# Altium PCB Radio.PcbDoc
Units mil, origin at the board's own origin, x right, y up, seen from the top; angles counter-clockwise.
Board outline 1170 x 1315 mil, 2 copper layers (Top Layer, Bottom Layer), stack 60.4 mil thick; 18 components, 17 nets, 106 pads, 43 vias.
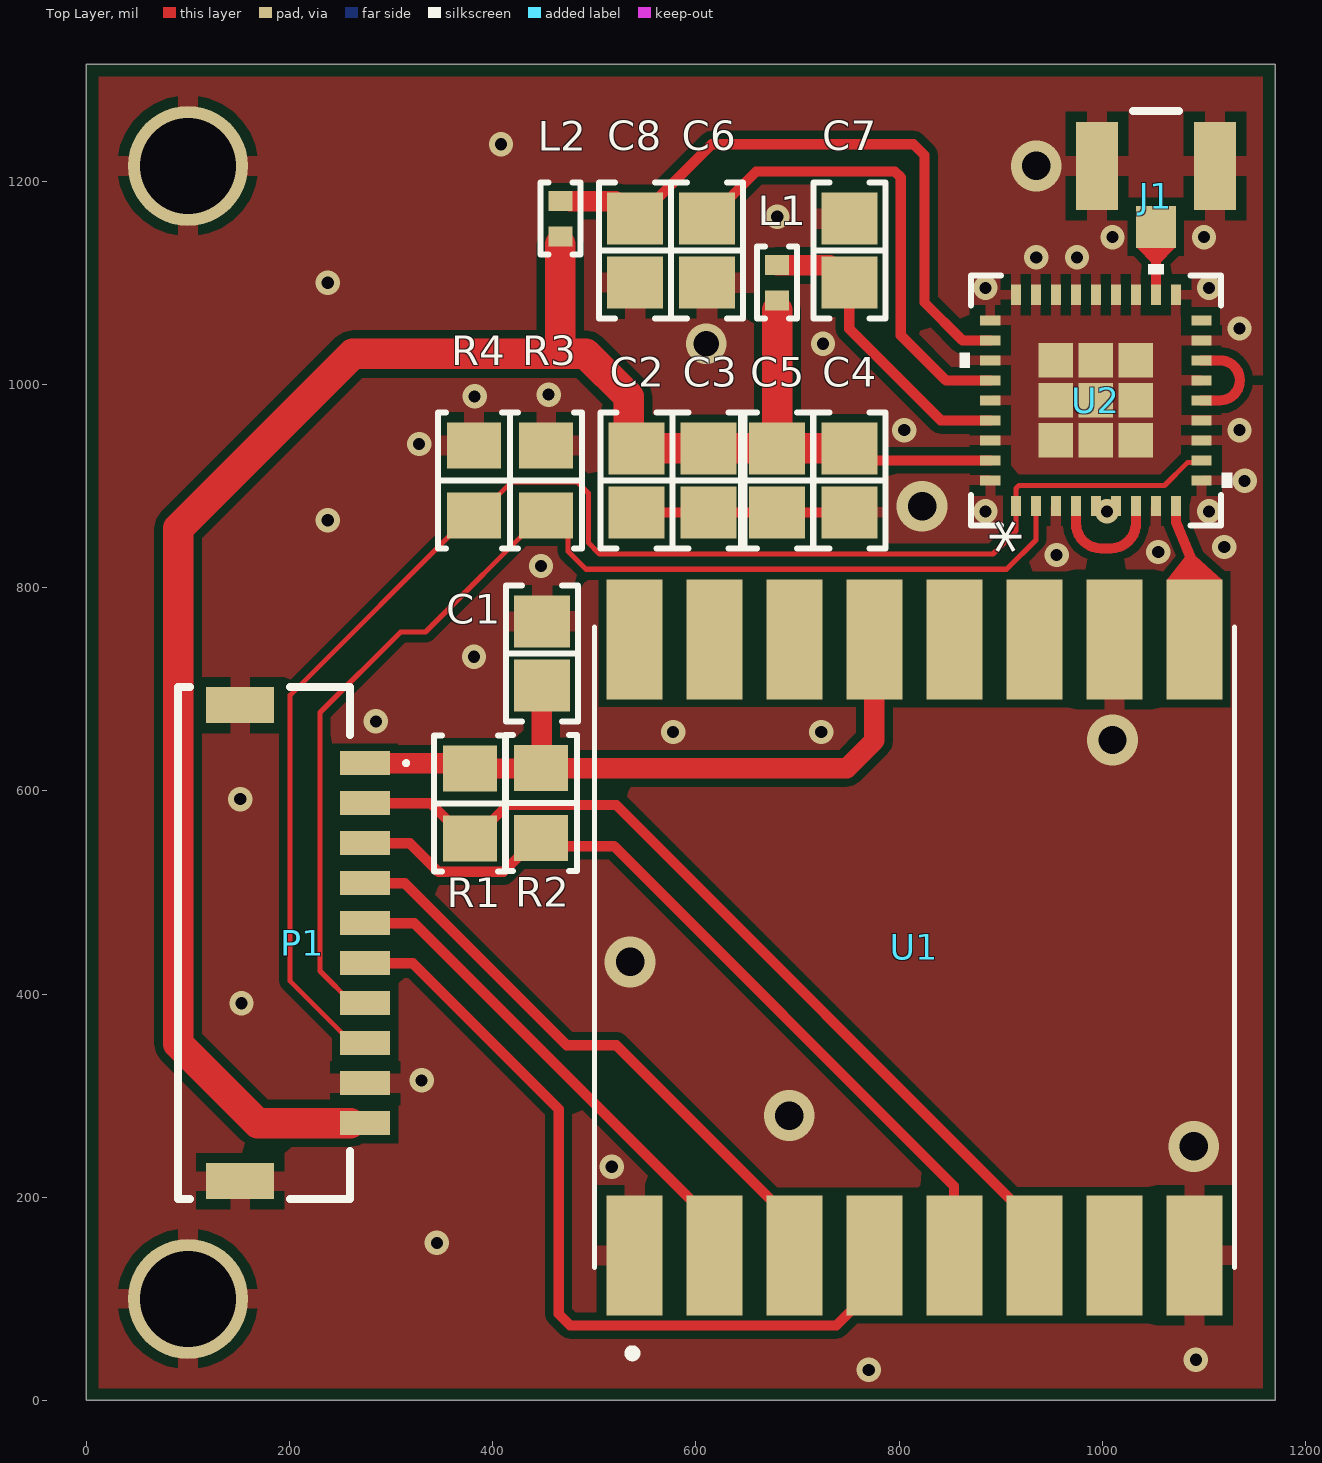
[diagram p0: Top Layer view]
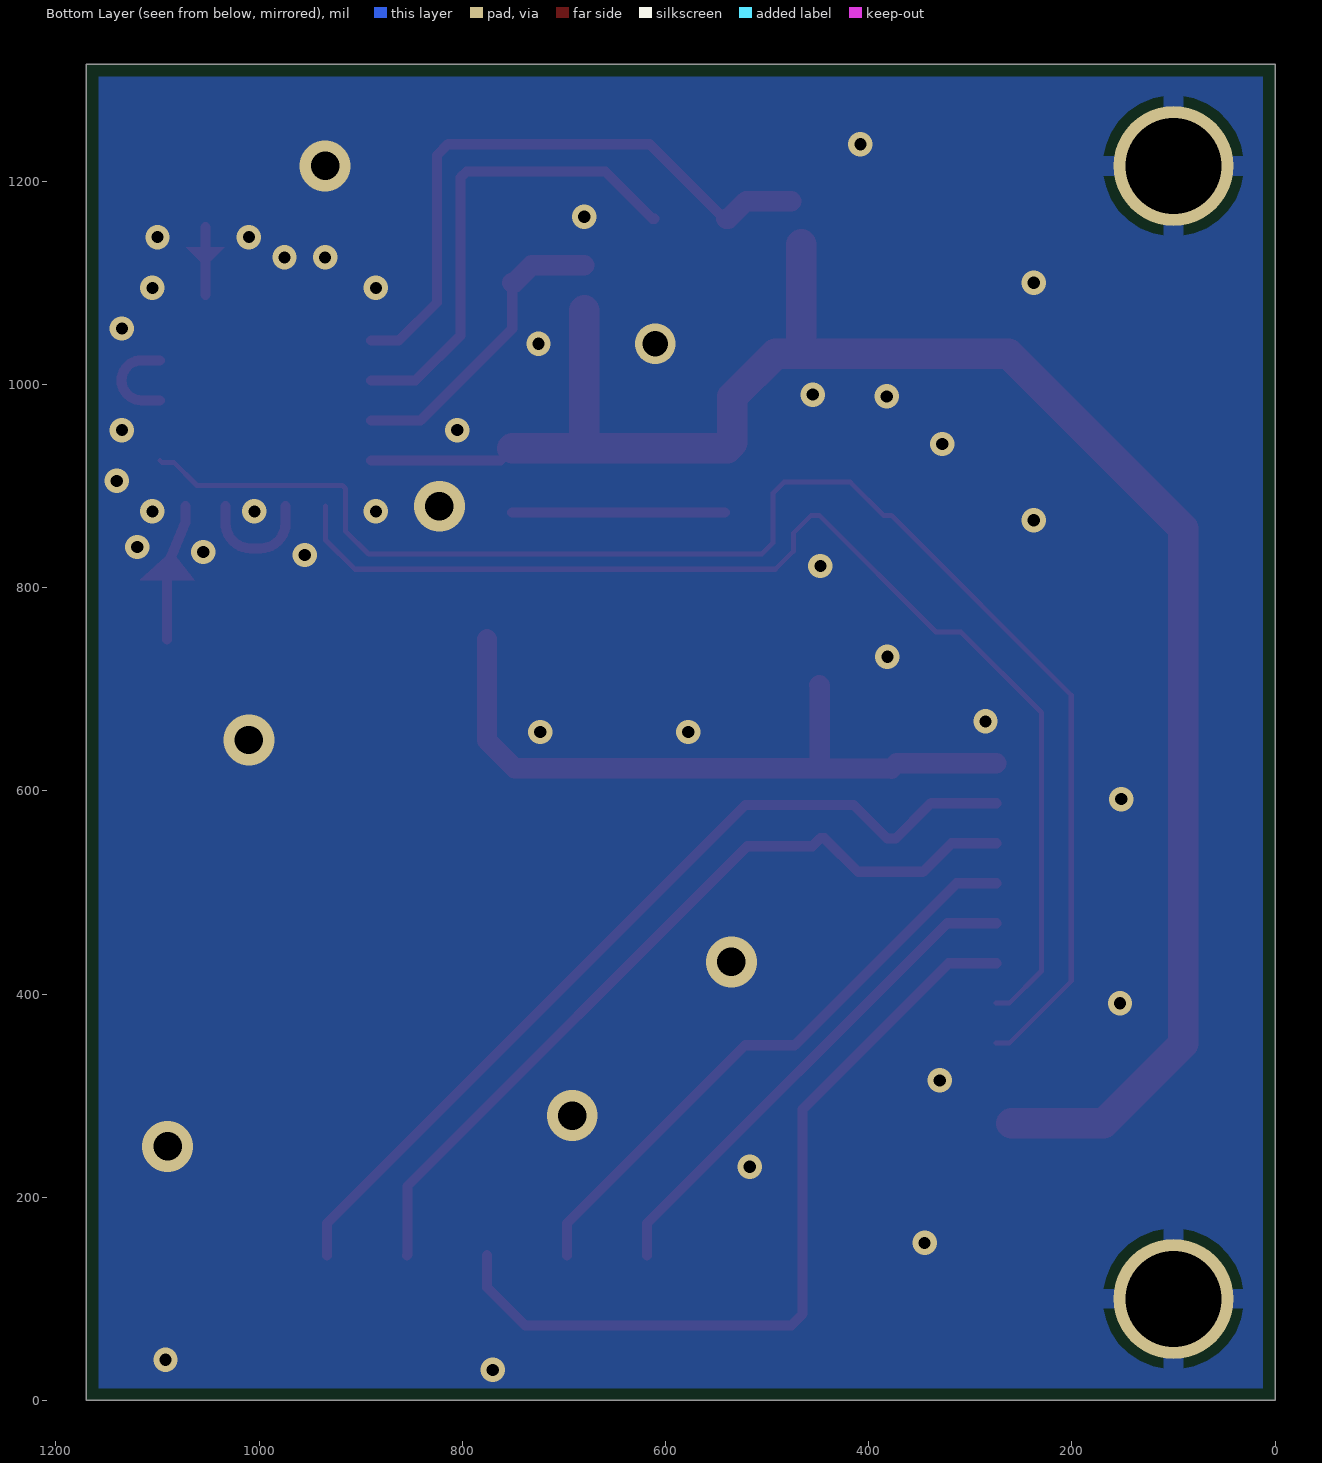
[diagram p1: Bottom Layer view, seen from below]
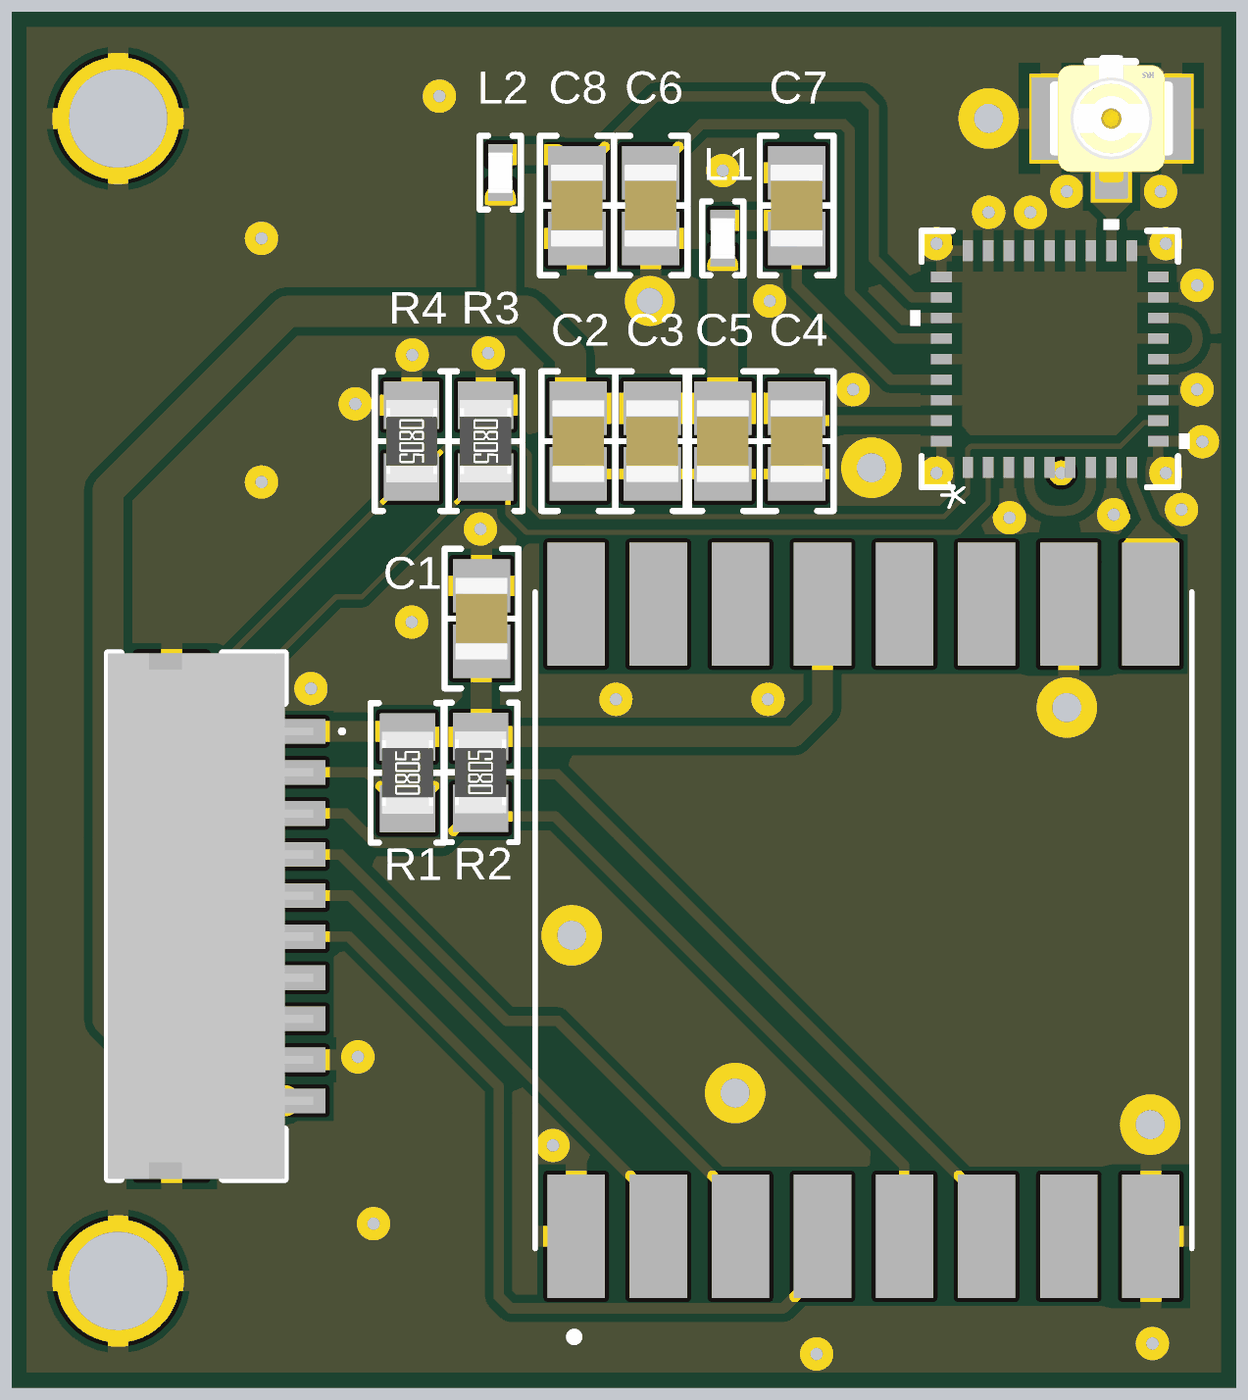
[diagram p2: 3D render of the assembled board from above, using the file's embedded part models]

## Layer stack, top to bottom
Top Solder: solder mask 0.5, Solder Resist, Dk 3.3
Top Layer: signal copper 0.7
Dielectric1: core 59, FR-4, Dk 4.3
Bottom Layer: signal copper 0.7
Bottom Solder: solder mask 0.5, Solder Resist, Dk 3.3

## Board outline
0,0 0,1315 1170,1315 1170,0

## Design rules (kind name [scope] priority, off if disabled: settings)
BoardOutlineClearance [All] p1: gap=11.81 ignorepadtopadclearanceinfootprint=FALSE except(15.75: Arc-SplitBarrior Arc-SplitContinuation Track-SplitBarrior Track-SplitContinuation SMDPad-SplitBarrior SMDPad-SplitContinuation THPad-SplitBarrior THPad-SplitContinuation Via-SplitBarrior Via-SplitContinuation Fill-SplitBarrior Fill-SplitContinuation Poly-SplitBarrior Poly-SplitContinuation Region-SplitBarrior Region-SplitContinuation Text-SplitBarrior Text-SplitContinuation)
Clearance "Clearance Different Nets" [All] p1: gap=7.87 ignorepadtopadclearanceinfootprint=FALSE except(3.5: Arc-Arc Arc-Track Arc-SMDPad Track-Track Track-SMDPad; 5: SMDPad-SMDPad SMDPad-Via THPad-Via Via-Via; 10: Arc-Via Arc-Text Track-Via Track-Text SMDPad-Text THPad-Text Via-Text Fill-Text Poly-Text Region-Text Text-Text; 19.68: THPad-THPad Via-Hole)
Clearance "Clearance Same Nets" [All] p2: gap=7.87 ignorepadtopadclearanceinfootprint=FALSE except(3.5: Arc-Arc Arc-Track Arc-SMDPad Track-Track Track-SMDPad SMDPad-SMDPad; 5: SMDPad-Via THPad-Via; 10: Arc-Via Arc-Text Track-Via Track-Text SMDPad-Text THPad-Text Via-Via Via-Text Fill-Text Poly-Text Region-Text Text-Text)
Clearance "Clearance Bottom Layer" [OnLayer('Bottom Layer')] p3: gap=8 ignorepadtopadclearanceinfootprint=TRUE except(10: Arc-Text Track-Text SMDPad-Text THPad-Text Via-Text Fill-Text Poly-Text Region-Text Text-Text)
Clearance "Clearance Top Layer" [OnLayer('Top Layer')] p4: gap=8 ignorepadtopadclearanceinfootprint=TRUE except(10: Arc-Text Track-Text SMDPad-Text THPad-Text Via-Text Fill-Text Poly-Text Region-Text Text-Text)
HoleSize [All] p1: absolutevalues=TRUE maxlimit=248.03 minlimit=7.87 maxpercent=80.000 minpercent=20.000
MinimumAnnularRing [All] p1: minimumring=5.12
MinimumSolderMaskSliver [All] p1: minsoldermaskwidth=3.94
PolygonConnect PolygonConnect_1 [All] p1: thpad.connectstyle=Relief thpad.reliefconductorwidth=20 thpad.reliefentries=4 thpad.polygonreliefangle="90 Angle" thpad.airgapwidth=10 smdpad.connectstyle=Relief smdpad.reliefconductorwidth=20 smdpad.reliefentries=4 smdpad.polygonreliefangle="90 Angle" smdpad.airgapwidth=10 via.connectstyle=Direct via.reliefconductorwidth=20 via.reliefentries=4 via.polygonreliefangle="90 Angle" via.airgapwidth=10
RoutingCorners [All] p1: cornerstyle=Round minsetback=100 maxsetback=100
RoutingVias [All] p1: holewidth=19.68 width=39.37 viastyle="Through Hole" minholewidth=7.87 minwidth=13.78 maxholewidth=39.37 maxwidth=78.74
SilkToSilkClearance [All] p1: silktosilkclearance=3.94
SilkToSolderMaskClearance [IsPad] p1: minsilkscreentomaskgap=3.94 clearancetoexposedcopper=TRUE
SolderMaskExpansion [All] p1: expansion=4 istentingtop=FALSE
Width [All] p1: maxlimit=100 minlimit=3.5 preferedwidth=15
25 further rules are at their usual default settings.

## Components (designator, comment, footprint, x,y, rotation, side; value= is the part's Value field where it differs from the comment)
C1 "10 µF" "CAP 0805_2012" 448.58,735.35 r270 top
C2 "68pF" "CAP 0805_2012" 541.38,905.57 r90 top
C3 "4.7 µF" "CAP 0805_2012" 612.32,905.57 r90 top
C4 "1000 pF" "CAP 0805_2012" 750.88,905.57 r90 top
C5 "33pF" "CAP 0805_2012" 680,905.57 r90 top
C6 "22 pF" "CAP 0805_2012" 610.82,1131.55 r90 top
C7 "1500 pF" "CAP 0805_2012" 750.88,1131.55 r270 top
C8 "1pF" "CAP 0805_2012" 540.12,1131.55 r90 top
J1 "U.FL-R-SMT-1(10)" FP-U_FL-R-SMT-1_10-MFG 1052.69,1215 r180 top
L1 "3.3 nH" "IND 0402_1005" 680,1100.06 r270 top
L2 "6.8 nH" "IND 0402_1005" 466.57,1163.05 r270 top
P1 "SM10B-SHLS-TF(LF)(SN)" JST-SM10B-SHLS-TF_V 175,450 r270 top
R1 "100 kOhms" "RES 0805_2012" 377.6,587.38 r90 top
R2 "100 kOhms" "RES 0805_2012" 447.56,587.8 r90 top
R3 "100 kOhms" "RES 0805_2012" 452.56,905.57 r270 top
R4 "100 kOhms" "RES 0805_2012" 381.57,905.57 r270 top
U1 "RFM95W-915S2" XCVR_RFM95W-915S2 815,446 r90 top locked
U2 "SKY66122-11" SKY66122-11_SKY 993.64,984.31 r90 top

## Footprints (in the part's own frame and the unit in brackets; to place one, negate y for a bottom-side part, rotate by r counter-clockwise, add the part's x,y. Pads: shape width x height; smd on the part's side, far side on the other; paste and mask are expansions set on the pad)
"CAP 0805_2012" [mm] "Chip Capacitor, 2-Leads, Body 2.00x1.20mm, IPC Medium Density"
  rect 1.3x1.4 smd: 1(-0.8,0) 2(0.8,0)
  silkscreen extent -1.7,-0.9 1.7,0.9, body extent -1,-0.64 1,0.64, height 1.26
FP-U_FL-R-SMT-1_10-MFG [mm]
  rect 1x1.05 smd paste-1000 mask+0: 1(0,1.525)
  rect 1.05x2.2 smd paste-1000 mask+0: 2(-1.475,0) 3(1.475,0)
  silkscreen extent -0.58,-1.38 0.58,-1.38, body extent -2.1,-1.48 2.1,2.15, height 0.25
"IND 0402_1005" [mm] "Inductor, 2-Leads, Body 1.02x0.51mm, IPC Medium Density"
  rect 0.5x0.6 smd: 1(-0.44,0) 2(0.44,0)
  silkscreen extent -0.9,-0.5 0.9,0.5, body extent -0.5,-0.3 0.5,0.3, height 0.6
JST-SM10B-SHLS-TF_V [mm] "SMD, 10-Leads, Body 12.8x4.3mm, Pitch 1mm"
  rect 0.6x1.25 smd: 1(-4.5,2.525) 2(-3.5,2.525) 3(-2.5,2.525) 4(-1.5,2.525) 5(-0.5,2.525) 6(0.5,2.525) 7(1.5,2.525) 8(2.5,2.525) 9(3.5,2.525) 10(4.5,2.525)
  rect 0.9x1.7 smd: MP1(-5.95,-0.6) MP2(5.95,-0.6)
  silkscreen extent -6.4,-2.15 6.4,3.6, body extent -6.4,-2.15 6.4,2.85, height 1.8
"RES 0805_2012" [mm] "Chip Resistor, 2-Leads, Body 2.00x1.25mm, IPC Medium Density"
  rect 1.15x1.35 smd: 1(-0.875,0) 2(0.875,0)
  silkscreen extent -1.7,-0.9 1.7,0.9, body extent -1,-0.62 1,0.63, height 0.6
SKY66122-11_SKY [mil]
  rect 20x10 smd paste+0 mask+0: 1(-104,78.74) 2(-104,59.06) 3(-104,39.37) 4(-104,19.69) 5(-104,0) 6(-104,-19.68) 7(-104,-39.37) 8(-104,-59.06) 9(-104,-78.74) 19(104,-78.74) 20(104,-59.06) 21(104,-39.37) 22(104,-19.68) 23(104,0) 24(104,19.69) 25(104,39.37) 26(104,59.06) 27(104,78.74)
  rect 10x20 smd paste+0 mask+0: 10(-78.74,-104) 11(-59.06,-104) 12(-39.37,-104) 13(-19.69,-104) 14(0,-104) 15(19.68,-104) 16(39.37,-104) 17(59.06,-104) 18(78.74,-104) 28(78.74,104) 29(59.06,104) 30(39.37,104) 31(19.68,104) 32(0,104) 33(-19.69,104) 34(-39.37,104) 35(-59.06,104) 36(-78.74,104)
  rect 34x34 smd paste-17 mask-17: 37(-39.37,39.37) 38(-39.37,0) 39(-39.37,-39.37) 40(0,39.37) 41(0,0) 42(0,-39.37) 43(39.37,39.37) 44(39.37,0) 45(39.37,-39.37)
  silkscreen extent -123,-134 134,134
XCVR_RFM95W-915S2 [mm]
  rect 3x1.4 smd: 1(-7.7,7) 2(-7.7,5) 3(-7.7,3) 4(-7.7,1) 5(-7.7,-1) 6(-7.7,-3) 7(-7.7,-5) 8(-7.7,-7) 9(7.7,-7) 10(7.7,-5) 11(7.7,-3) 12(7.7,-1) 13(7.7,1) 14(7.7,3) 15(7.7,5) 16(7.7,7)
  silkscreen extent -10.25,-8 8,8

## Part data
C1: library part MD0805BB106M100NHT-EM, "CAP CER 10UF 10V X7R 0805", Device Package="0805 (2012 Metric)", Manufacturer="Knowles Novacap", Operating Temperature="-55°C ~ 125°C", Supplier Part Number 1=1763-MD0805BB106M100NHT-EMCT-ND, Temperature Coefficient=X7R, Tolerance=±20%, Voltage - Rated=10V, Applications="Medical, Non-Critical", Capacitance="10 µF", ComponentLink1Description=Datasheet, ComponentLink1URL="https://mm.digikey.com/Volume0/opasdata/d220001/medias/docus/5546/MD Series R3.pdf", ComponentLink2Description="DigiKey Link", ComponentLink2URL=https://www.digikey.com/en/products/detail/knowles-novacap/MD0805BB106M100NHT-EM/21406856, LastUpdated="2/9/2024 8:13:14 PM", Lifecycle Status=Active, Minimum Order=1, Mounting Type="Surface Mount, MLCC", Package / Case="0805 (2012 Metric)", Packaging=TapeAndReel, Part Number=MD0805BB106M100NHT-EM, PartId=57210, Price=0.59, Series=MD, Supplier 1=DigiKey
C2: library part 08055A680JAT2A, "CAP CER 68PF 50V C0G/NP0 0805", Device Package="0805 (2012 Metric)", Manufacturer="AVX Corporation", Operating Temperature="-55°C ~ 125°C", Supplier Part Number 1=478-1314-1-ND, Temperature Coefficient="C0G, NP0", Tolerance=±5%, Voltage - Rated=50V, Applications="General Purpose", Capacitance=68pF, ComponentLink1Description=Datasheet, ComponentLink1URL=http://datasheets.avx.com/C0GNP0-Dielectric.pdf, ComponentLink2Description="DigiKey Link", ComponentLink2URL=http://digikey.com/product-detail/en/avx-corporation/08055A680JAT2A/478-1314-1-ND/564346, LastUpdated="9/2/2020 1:04:40 AM", Lifecycle Status=Active, Minimum Order=1, Mounting Type="Surface Mount, MLCC", Package / Case="0805 (2012 Metric)", Packaging=TapeAndReel, Part Number=08055A680JAT2A, Part Status=Active, PartId=3231, Price=0.02, Series=-, Size / Dimension="0.079\" L x 0.049\" W (2.01mm x 1.25mm)", Supplier 1=DigiKey, Thickness (Max)="0.037\" (0.94mm)"
C3: library part CL21B475KAFNNNE, "CAP CER 4.7UF 25V X7R 0805", Device Package="0805 (2012 Metric)", Manufacturer="Samsung Electro-Mechanics", Operating Temperature="-55°C ~ 125°C", Supplier Part Number 1=1276-2969-1-ND, Temperature Coefficient=X7R, Tolerance=±10%, Voltage - Rated=25V, Applications="General Purpose", Capacitance="4.7 µF", ComponentLink1Description=Datasheet, ComponentLink1URL=http://www.samsungsem.com/kr/support/product-search/mlcc/CL21B475KAFNNNE.jsp, ComponentLink2Description="DigiKey Link", ComponentLink2URL=https://www.digikey.com/en/products/detail/samsung-electro-mechanics/CL21B475KAFNNNE/3888627, LastUpdated="2/9/2024 8:16:07 PM", Lifecycle Status=Active, Minimum Order=1, Mounting Type="Surface Mount, MLCC", Package / Case="0805 (2012 Metric)", Packaging=TapeAndReel, Part Number=CL21B475KAFNNNE, Part Status=Active, PartId=3072, Price=0.08, Series=CL, Size / Dimension="0.079\" L x 0.049\" W (2.00mm x 1.25mm)", Supplier 1=DigiKey, Thickness (Max)="0.053\" (1.35mm)"
C4: library part C0805X102J5HACAUTO, "CAP CER 0805 1NF 50V ULTRA STABL", Device Package="0805 (2012 Metric)", Manufacturer=KEMET, Operating Temperature="-55°C ~ 150°C", Ratings=AEC-Q200, Supplier Part Number 1=399-16876-1-ND, Temperature Coefficient=X8R, Tolerance=±5%, Voltage - Rated=50V, Applications="Automotive, Boardflex Sensitive", Capacitance="1000 pF", ComponentLink1Description=Datasheet, ComponentLink1URL=https://api.kemet.com/component-edge/download/datasheet/C0805X102J5HACAUTO.pdf, ComponentLink2Description="DigiKey Link", ComponentLink2URL=https://www.digikey.com/en/products/detail/kemet/C0805X102J5HACAUTO/8324462, Features="Low ESL, Soft Termination, High Temperature", LastUpdated="2/9/2024 8:16:01 PM", Lifecycle Status=Active, Minimum Order=1, Mounting Type="Surface Mount, MLCC", Package / Case="0805 (2012 Metric)", Packaging=TapeAndReel, Part Number=C0805X102J5HACAUTO, Part Status=Active, PartId=5533, Price=0.02, Series="SMD Auto X8R HT150C Flex", Size / Dimension="0.079\" L x 0.049\" W (2.00mm x 1.25mm)", Supplier 1=DigiKey, Thickness (Max)="0.039\" (0.98mm)"
C5: library part 08055C330KAT2A, "CAP CER 33PF 50V X7R 0805", Device Package="0805 (2012 Metric)", Manufacturer="AVX Corporation", Operating Temperature="-55°C ~ 125°C", Supplier Part Number 1=478-12787-1-ND, Temperature Coefficient=X7R, Tolerance=±10%, Voltage - Rated=50V, Applications="General Purpose", Capacitance=33pF, ComponentLink1Description=Datasheet, ComponentLink1URL=http://datasheets.avx.com/X7RDielectric.pdf, ComponentLink2Description="DigiKey Link", ComponentLink2URL=http://digikey.com/product-detail/en/avx-corporation/08055C330KAT2A/478-12787-1-ND/9949327, LastUpdated="9/2/2020 1:04:40 AM", Lifecycle Status=Active, Minimum Order=1, Mounting Type="Surface Mount, MLCC", Package / Case="0805 (2012 Metric)", Packaging=TapeAndReel, Part Number=08055C330KAT2A, Part Status=Active, PartId=3690, Price=0.04, Series=-, Size / Dimension="0.079\" L x 0.049\" W (2.01mm x 1.25mm)", Supplier 1=DigiKey, Thickness (Max)="0.037\" (0.94mm)"
C6: library part C0805C220J5GACAUTO, "CAP CER 22PF 50V C0G/NP0 0805", Device Package="0805 (2012 Metric)", Manufacturer=KEMET, Operating Temperature="-55°C ~ 125°C", Ratings=AEC-Q200, Supplier Part Number 1=399-6937-1-ND, Temperature Coefficient="C0G, NP0", Tolerance=±5%, Voltage - Rated=50V, Applications=Automotive, Capacitance="22 pF", ComponentLink1Description=Datasheet, ComponentLink1URL=https://api.kemet.com/component-edge/download/datasheet/C0805C220J5GACAUTO.pdf, ComponentLink2Description="DigiKey Link", ComponentLink2URL=https://www.digikey.com/en/products/detail/kemet/C0805C220J5GACAUTO/3314930, Features="Low ESL", LastUpdated="2/9/2024 8:16:09 PM", Lifecycle Status=Active, Minimum Order=1, Mounting Type="Surface Mount, MLCC", Package / Case="0805 (2012 Metric)", Packaging=TapeAndReel, Part Number=C0805C220J5GACAUTO, Part Status=Active, PartId=2537, Price=0.01, Series="SMD Auto C0G", Size / Dimension="0.079\" L x 0.049\" W (2.00mm x 1.25mm)", Supplier 1=DigiKey, Thickness (Max)="0.035\" (0.88mm)"
C7: library part C0805C152KARAC7800, "CAP CER 1500PF 250V X7R 0805", Device Package="0805 (2012 Metric)", Manufacturer=KEMET, Operating Temperature="-55°C ~ 125°C", Supplier Part Number 1=399-15450-1-ND, Temperature Coefficient=X7R, Tolerance=±10%, Voltage - Rated=250V, Applications="Bypass, Decoupling", Capacitance="1500 pF", ComponentLink1Description=Datasheet, ComponentLink1URL=https://api.kemet.com/component-edge/download/datasheet/C0805C152KARAC7800.pdf, ComponentLink2Description="DigiKey Link", ComponentLink2URL=https://www.digikey.com/en/products/detail/kemet/C0805C152KARAC7800/2211967, LastUpdated="2/9/2024 8:16:01 PM", Lifecycle Status=Active, Minimum Order=1, Mounting Type="Surface Mount, MLCC", Package / Case="0805 (2012 Metric)", Packaging=TapeAndReel, Part Number=C0805C152KARAC7800, Part Status=Active, PartId=5598, Price=0.09, Series="SMD Comm X7R", Size / Dimension="0.079\" L x 0.049\" W (2.00mm x 1.25mm)", Supplier 1=DigiKey, Thickness (Max)="0.035\" (0.88mm)"
C8: library part 08055A1R0CAT2A, "CAP CER 1PF 50V C0G/NP0 0805", Device Package="0805 (2012 Metric)", Manufacturer="AVX Corporation", Operating Temperature="-55°C ~ 125°C", Supplier Part Number 1=478-1292-1-ND, Temperature Coefficient="C0G, NP0", Tolerance=±0.25pF, Voltage - Rated=50V, Applications="General Purpose", Capacitance=1pF, ComponentLink1Description=Datasheet, ComponentLink1URL=http://datasheets.avx.com/C0GNP0-Dielectric.pdf, ComponentLink2Description="DigiKey Link", ComponentLink2URL=http://digikey.com/product-detail/en/avx-corporation/08055A1R0CAT2A/478-1292-1-ND/564324, LastUpdated="9/2/2020 1:04:39 AM", Lifecycle Status=Active, Minimum Order=1, Mounting Type="Surface Mount, MLCC", Package / Case="0805 (2012 Metric)", Packaging=TapeAndReel, Part Number=08055A1R0CAT2A, Part Status=Active, PartId=3785, Price=0.04, Series=-, Size / Dimension="0.079\" L x 0.049\" W (2.01mm x 1.25mm)", Supplier 1=DigiKey, Thickness (Max)="0.037\" (0.94mm)"
J1: library part CMP-2000-05152-3, "CONN U.FL RCPT STR 50 OHM SMD", Dielectric Material=Polymer, Frequency=6GHz, Housing Color=Beige, Insulation Resistance=500MR, Max Operating Temperature=90°C, Min Operating Temperature=-40°C, Package Quantity=2500, Body Material=Bronze, Body Plating=Silver, Connector Type=Coaxial, Contact Material=Brass, Contact Plating=Gold, Depth=3.1mm, Fastening Type=Snap, Gender=Male, Impedance=50R, Lead Free="Lead Free", Length=3mm, Max Frequency=6GHz, Mount="Surface Mount", Orientation=Straight, Packaging="Cut Tape", Radiation Hardening=No, REACH SVHC="No SVHC", Series=U.FL, Termination=Solder, Weight=0.001764oz, Wire/Cable Type=Coaxial
L1: library part AISC-0402HP-3N3J-T, "FIXED IND 3.3NH 1.7A 45 MOHM SMD", Current Rating (Amps)="1.7 A", DC Resistance (DCR)="45mOhm Max", Device Package="0402 (1005 Metric)", Frequency - Self Resonant=8.5GHz, Inductance Frequency - Test="250 MHz", Manufacturer="Abracon LLC", Operating Temperature="-40°C ~ 125°C", Q @ Freq="23 @ 250MHz", Supplier Part Number 1=535-AISC-0402HP-3N3J-TCT-ND, Tolerance=±5%, ComponentLink1Description=Datasheet, ComponentLink1URL=https://abracon.com/Magnetics/inductors/AISC-0402HP.pdf, ComponentLink2Description="DigiKey Link", ComponentLink2URL=https://www.digikey.com/en/products/detail/abracon-llc/AISC-0402HP-3N3J-T/4215111, Height - Seated (Max)="0.024\" (0.60mm)", Inductance="3.3 nH", LastUpdated="6/3/2024 8:12:58 PM", Lifecycle Status=Active, Material - Core=Ceramic, Minimum Order=1, Mounting Type="Surface Mount", Package / Case="0402 (1005 Metric)", Packaging=TapeAndReel, Part Number=AISC-0402HP-3N3J-T, Part Status=Active, PartId=2529, Price=0.09, Series=AISC-0402HP, Shielding=Unshielded, Size / Dimension="0.039\" L x 0.022\" W (1.00mm x 0.55mm)", Supplier 1=DigiKey, Supplier Device Package="0402 (1005 Metric)", Type="Drum Core, Wirewound"
L2: library part AISC-0402HP-6N8J-T, "FIXED IND 6.8NH 1.4A 65 MOHM SMD", Current Rating (Amps)="1.4 A", DC Resistance (DCR)="65mOhm Max", Device Package="0402 (1005 Metric)", Frequency - Self Resonant=5.8GHz, Inductance Frequency - Test="250 MHz", Manufacturer="Abracon LLC", Operating Temperature="-40°C ~ 125°C", Q @ Freq="25 @ 250MHz", Supplier Part Number 1=535-12227-1-ND, Tolerance=±5%, ComponentLink1Description=Datasheet, ComponentLink1URL=https://abracon.com/Magnetics/inductors/AISC-0402HP.pdf, ComponentLink2Description="DigiKey Link", ComponentLink2URL=https://www.digikey.com/en/products/detail/abracon-llc/AISC-0402HP-6N8J-T/4215114, Height - Seated (Max)="0.024\" (0.60mm)", Inductance="6.8 nH", LastUpdated="6/3/2024 8:12:58 PM", Lifecycle Status=Active, Material - Core=Ceramic, Minimum Order=1, Mounting Type="Surface Mount", Package / Case="0402 (1005 Metric)", Packaging=TapeAndReel, Part Number=AISC-0402HP-6N8J-T, Part Status=Active, PartId=2530, Price=0.10, Series=AISC-0402HP, Shielding=Unshielded, Size / Dimension="0.039\" L x 0.022\" W (1.00mm x 0.55mm)", Supplier 1=DigiKey, Supplier Device Package="0402 (1005 Metric)", Type="Drum Core, Wirewound"
P1: library part CMP-2000-07083-1, "Male Header, Pitch 1 mm, 1 x 10 Position, Height 1.8 mm, -25 to 85 degC", Manufacturer=JST, Package Description="Male Header, Pitch 1 mm, 1 x 10 Position, Height 1.8 mm", Package Reference=SM10B-SHLS-TF, Datasheet URL=http://www.jst-mfg.com/product/pdf/eng/eSHL.pdf, Datasheet Version=04/2015, Manufacturer URL=http://www.jst.com/home2.html, Mounting Technology=SurfaceMount
R1 R2 R3 R4: library part CPF0805B100KE, "RES SMD 100K OHM 0.1% 1/10W 0805", Device Package="0805 (2012 Metric)", Manufacturer="TE Connectivity Passive Product", Operating Temperature="-55°C ~ 155°C", Power (Watts)="0.1W, 1/10W", Supplier Device Package=0805, Supplier Part Number 1=A106042CT-ND, Temperature Coefficient=±25ppm/°C, Tolerance=±0.1%, ComponentLink1Description=Datasheet, ComponentLink1URL=https://www.te.com/commerce/DocumentDelivery/DDEController?Action=srchrtrv&DocNm=1773200&DocType=DS&DocLang=English, ComponentLink2Description="DigiKey Link", ComponentLink2URL=https://www.digikey.com/en/products/detail/te-connectivity-passive-product/CPF0805B100KE/2389788, Composition="Thin Film", Height - Seated (Max)="0.026\" (0.65mm)", LastUpdated="2/8/2024 9:02:39 PM", Lifecycle Status=Active, Minimum Order=1, Number of Terminations=2, Package / Case="0805 (2012 Metric)", Packaging=TapeAndReel, Part Number=CPF0805B100KE, Part Status=Active, PartId=27729, Price=0.09, Resistance="100 kOhms", Series="CPF, Neohm", Size / Dimension="0.079\" L x 0.049\" W (2.00mm x 1.25mm)", Supplier 1=DigiKey
U1: "RFM95(W) - Low Power Long Range Transceiver Module V1.0", Package=None, Availability=Unavailable, MP=RFM95W-915S2, Price=None
U2: library part CMP-008-000001-1, "No Description Available", Mfr_Name=Skyworks, Design Item ID=SKY66122-11, RefDes=RefDes, Source=SKY66122-11.SchLib, Type="Wireless and RF Integrated Circuits"

## Free pads (board coordinates)
  round 118.11 hole 94.49: 2(100,1215) 2(100,100)

## Via types
v1: diameter 24, hole 12, Top Layer to Bottom Layer, 36 vias
v2: diameter 50, hole 28, Top Layer to Bottom Layer, 6 vias
v3: diameter 40, hole 25, Top Layer to Bottom Layer, 1 vias

## Nets (pads, with @x,y where several pads share a name; then routed paths per layer and width w, separated by ;. In a path a pad name is that pad's centre, name@x,y a point inside that pad or via, vN(x,y) a via of type N, cw(c..) or ccw(c..) an arc to the next point about the centre after c; other vN are vias at no path point)
3.3V: C1.2 P1.1 R1.2 R2.2 U1.13 | length 695.9
  Top Layer w20: P1.1 372.26,627.17 R1.2 377.81,622.04 R2.2@446.94,622.04 ; C1.2 448.07,703.35 448.07,622.76 R2.2 748.4,622.24 775.63,649.47 U1.13
"4.2V BAT": C2.2 C3.2 C4.2 C5.2 L1.2 L2.2 P1.10 U2.35 | length 1876.4
  Top Layer w10: C4.2@762.69,925.25 U2.35
  Top Layer w30: P1.10@259.65,272.83 168.68,272.83 90.35,351.16 90.35,858.25 262.1,1030 466.57,1030 ; L2.2@466.57,1138 466.57,1030 ; L1.2@680,1073 C5.2 ; C4.2 C5.2 ; 466.57,1030 491.78,1030 534.05,987.73 534.05,942.43 539.41,937.06 C2.2 C3.2 C5.2
CS_3V: P1.3 R2.1 U1.5 | length 815
  Top Layer w10: P1.3 318.39,548.43 346.36,520.45 346.72,520.45 346.88,520.29 410.57,520.29 443.62,553.35 R2.1 455.47,545.44 519.47,545.44 853.86,211.05 853.86,143.36 U1.5
EN: P1.8 R4.2 U2.1 U2.11 | length 1485.2
  Top Layer w5: P1.8 261.61,351.57 200.59,412.6 200.59,694.07 377.64,871.12 R4.2 385.51,871.12 418.15,903.76 483.28,903.76 494.13,892.9 494.13,844.06 505.15,833.05 892.38,833.05 914.9,855.57 914.9,897.64 917.83,900.57 1061.21,900.57 1083.96,923.32 1095.71,923.32 U2.11
FEMout: U1.9 U2.9 | length 134.8
  Top Layer w10: U2.9 1072.38,865.05 1090.59,821.08 U1.9
GND: C1.1 C2.1 C3.1 C4.1 C5.1 C6.1 C7.1 C8.1 J1.2 J1.3 P1.9 P1.MP1 P1.MP2 pad.2 R3.1 R4.1 U1.1 U1.8 U1.10 U2.3 U2.5 U2.6 U2.8 U2.10 U2.12 U2.13 U2.15 U2.17 U2.19 U2.21 U2.22 U2.23 U2.24 U2.25 U2.26 U2.27 U2.28 U2.30 U2.32 U2.34 U2.36 U2.37 U2.38 U2.39 U2.40 U2.41 U2.42 U2.43 U2.44 U2.45 | length 209.5
  Top Layer w10: C2.1 C4.1
  other v1: 770,30 1092.1,40 345,155 517.1,230 330,315 152.67,390.94 151.38,591.85 577.52,657.92 723.32,657.92 285,668.27 381.57,732 447.52,821.31 954.99,832.09 1055,835 1120,840 237.52,866.31 885,875 1004.62,875 1105,875 1140,905 327.52,941.31 805,955 1135,955 382.15,988.2 455,990 725,1040 1135,1055 885,1095 1105,1095 237.52,1100.06 935,1125 975,1125 1010,1145 1100,1145 680,1165 408.15,1236.41
  other v2: 1090,250 691.81,280.28 535.12,431.56 1010,650 822.56,880.02 935,1215
  other v3: 610,1040
MISO_3V: P1.5 U1.2 | length 497.6
  Top Layer w10: P1.5 322.81,469.68 618.15,174.35 U1.2
MOSI_3V: P1.4 U1.3 | length 592.6
  Top Layer w10: P1.4 313.38,509.06 472.86,349.57 521.66,349.57 696.89,174.35 U1.3
NetC6_2: C6.2 U2.31 | length 474.3
  Top Layer w10: C6.2 612.79,1163.05 659.33,1209.59 795.76,1209.59 801.62,1203.73 801.62,1048.38 846.01,1003.99 U2.31
NetJ1_1: J1.1 U2.20 | length 66.7
  Top Layer w10: U2.20 J1.1
NetU2_4: U2.4 U2.7 | length 124.7
  Top Layer w10: U2.4 973.95,863.24 ccw(c998.56,863.24) 998.56,838.64 1008.4,838.64 ccw(c1008.4,863.24) 1033.01,863.24 ; 1033.01,859.8 U2.7
NetU2_14: U2.14 U2.16 | length 97.9
  Top Layer w10: U2.14 1115.69,984.31 ccw(c1115.69,1003.99) 1135.37,1003.99 ccw(c1115.68,1003.99) 1115.68,1023.68 U2.16
RST_3V: P1.2 R1.1 U1.6 | length 888.8
  Top Layer w10: P1.2 338.8,587.8 373.66,552.93 R1.1 381.54,552.93 414.59,585.98 521.47,585.98 933.11,174.35 U1.6
SCK_3V: P1.6 U1.4 | length 814.1
  Top Layer w10: P1.6 321.3,430.31 465,286.62 465,85 476.2,73.8 738.07,73.8 775.63,111.35 U1.4
TX/RX: P1.7 R3.2 U2.2 | length 1174.6
  Top Layer w5: P1.7 261.61,390.94 230,422.56 230,677 309.31,756.31 333.82,756.31 448.62,871.12 R3.2 456.5,871.12 474.13,853.48 474.13,835.78 491.87,818.05 905.66,818.05 934.58,846.97 U2.2
VCC1: C7.2 L1.1 U2.33 | length 299.5
  Top Layer w10: C7.2 750.88,1054.71 840.96,964.62 U2.33
  Top Layer w20: L1.1 731.59,1117.38 748.91,1100.06 C7.2
VCC2: C8.2 L2.1 U2.29 | length 616.1
  Top Layer w10: C8.2 542.09,1163.05 615.45,1236.41 814.14,1236.41 824.96,1225.59 824.96,1080.63 862.22,1043.36 U2.29
  Top Layer w20: L2.1@476,1180.37 520.83,1180.37 538.15,1163.05 C8.2
pads on no net: U1.7 U1.11 U1.12 U1.14 U1.15 U1.16 U2.18

## Polygon pours and split planes (outlines as drawn)
GND on Bottom Layer "GND_L02_P000" (solid, remove dead copper, pour order 0): 0,0 1170,0 1170,1315 0,1315
GND on Top Layer "GND_L01_P001" (solid, remove dead copper, pour order 1): 0,0 1170,0 1170,1315 0,1315

## Other copper
Top Layer:
  region net FEMout: 1081.74,830.42 1092.36,830.42 1117.48,807.95 1116.8,807.27 1063.36,807.27
  region net NetJ1_1: 1033.86,1134.75 1050.3,1118.31 1055.53,1118.31 1071.98,1134.75

## Silkscreen, mask and mechanical layers (free items; w line width, h text height)
Board:
  the board outline again, w5

## Text inside footprints (layer, text, board x,y; h text height)
U2: Top Overlay "*" at 940.06,832.81 h50 r90; Top Assembly "*" at 927.56,884.06 h25 r90